# Altium PCB DIOBoard2.PcbDoc
Units mil, origin at the board's own origin, x right, y up, seen from the top; angles counter-clockwise.
Board outline 3937.01 x 5905.51 mil, 2 copper layers (Top Layer, Bottom Layer); 10 components, 98 nets, 59 pads, 7 vias.
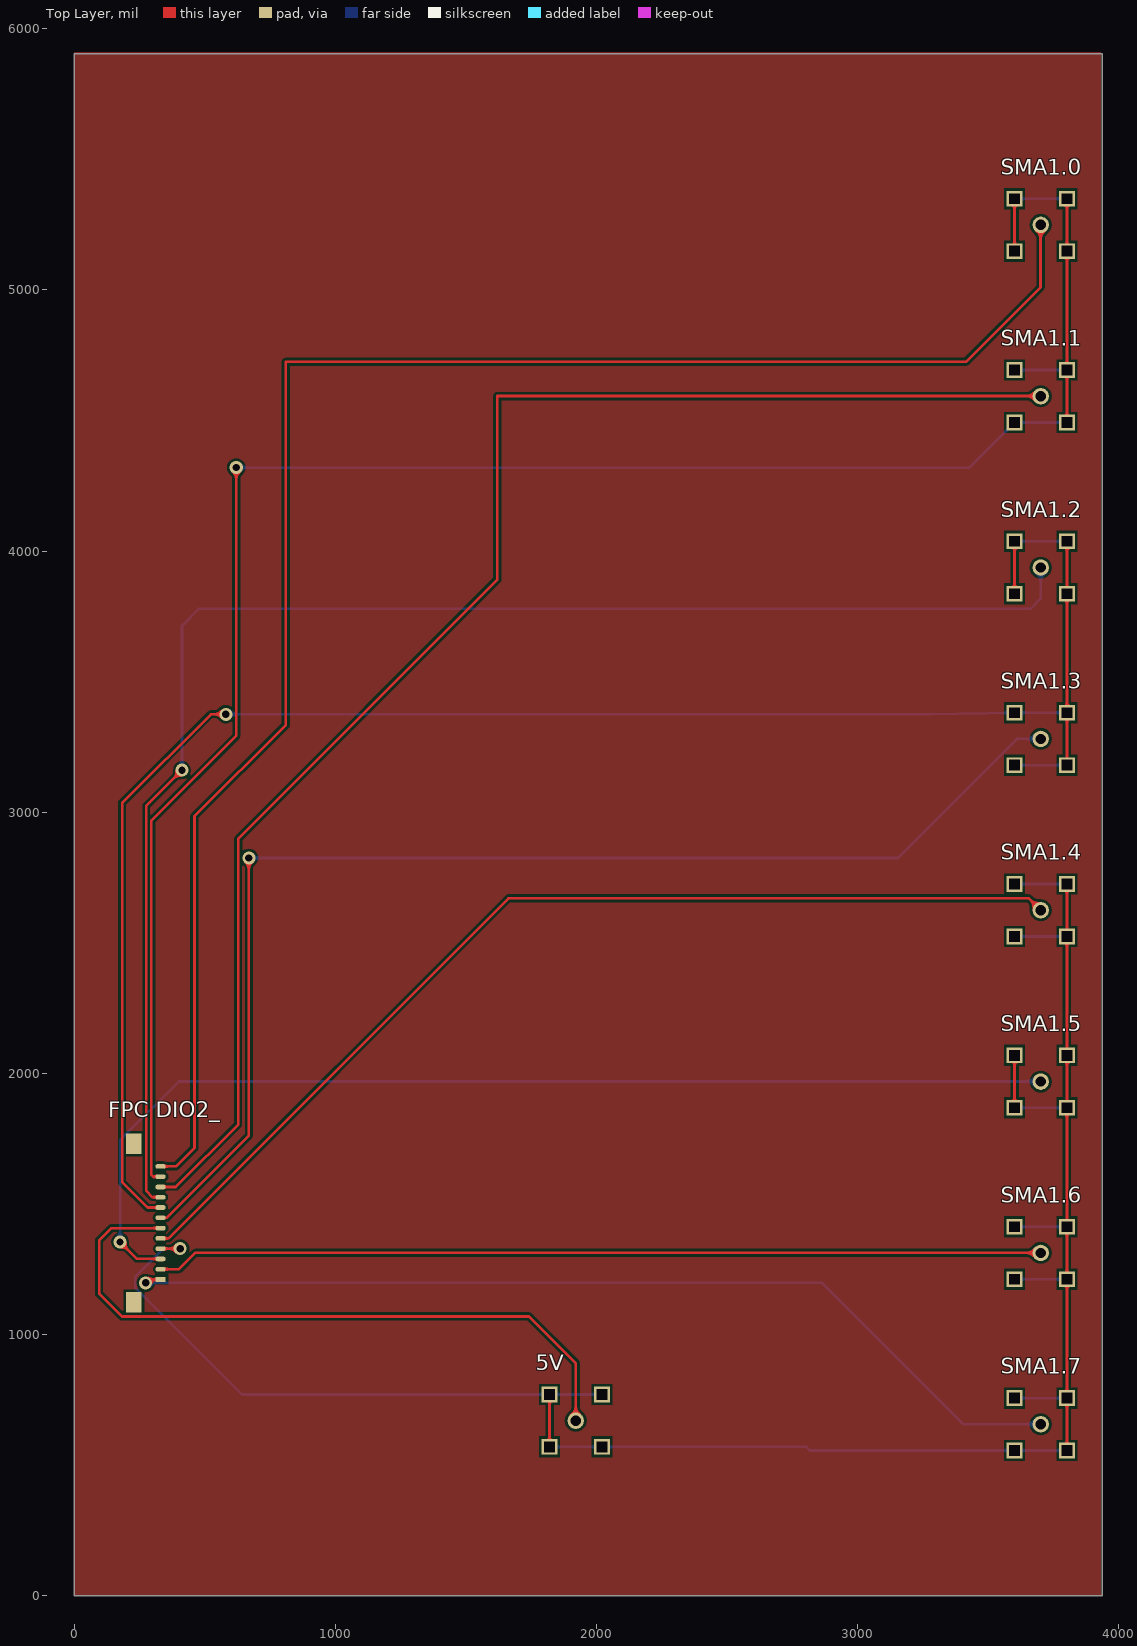
[diagram p0: Top Layer view]
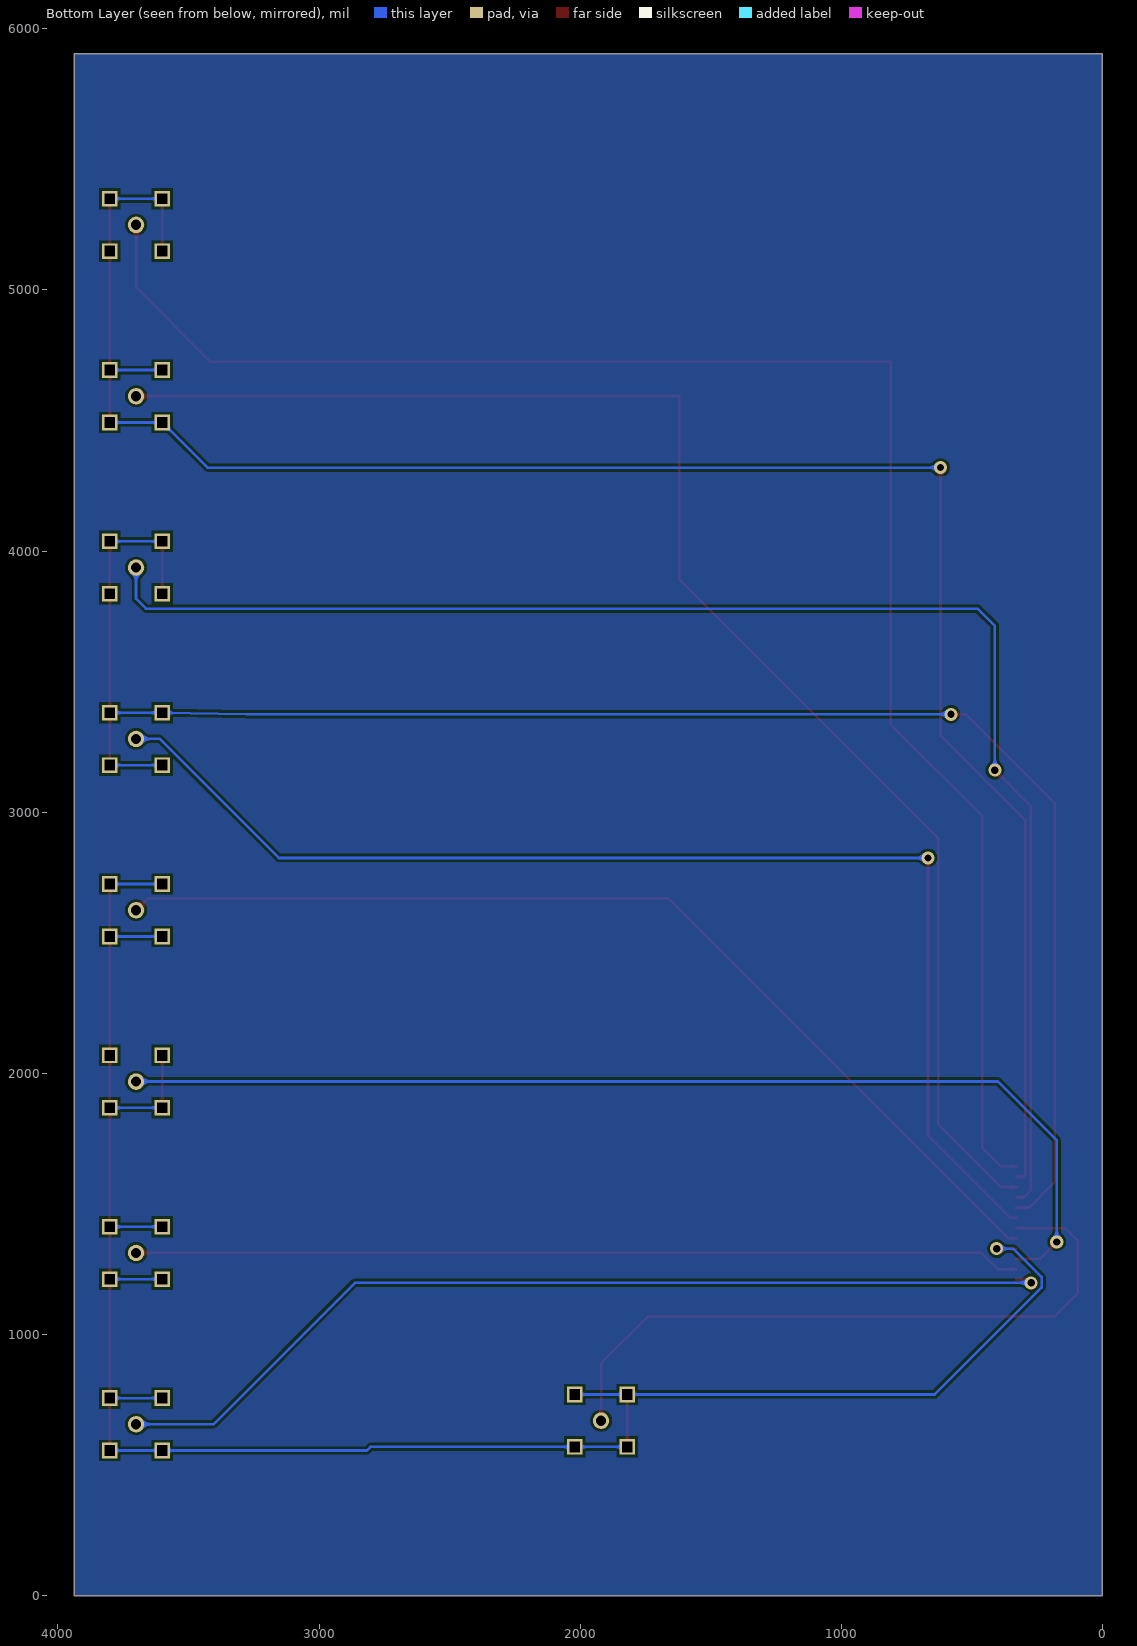
[diagram p1: Bottom Layer view, seen from below]

## Layer stack, top to bottom
Top Solder: solder mask 0.4, Solder Resist, Dk 3.5
Top Layer: signal copper 1.4
Dielectric 1: dielectric 12.6, FR-4, Dk 4.8
Bottom Layer: signal copper 1.4
Bottom Solder: solder mask 0.4, Solder Resist, Dk 3.5

## Board outline
0,0 3937.01,0 3937.01,5905.51 0,5905.51

## Design rules (kind name [scope] priority, off if disabled: settings)
Clearance [All] p1: gap=10 ignorepadtopadclearanceinfootprint=FALSE except(0: Arc-Hole Track-Hole SMDPad-Hole THPad-Hole Via-Hole Fill-Hole Poly-Hole Region-Hole Text-Hole)
PolygonConnect [All] p1: connectstyle=Relief reliefconductorwidth=10 reliefentries=4 polygonreliefangle="90 Angle" airgapwidth=10
RoutingVias [All] p1: holewidth=28 width=50 viastyle="Through Hole" minholewidth=28 minwidth=50 maxholewidth=28 maxwidth=50
SolderMaskExpansion [All] p1: expansion=4
Width [All] p1: maxlimit=10 minlimit=10 preferedwidth=10
30 further rules are at their usual default settings.

## Classes and differential pairs
component class DOIBoard2: 5V "FPC DIO2_" SMA1.1 SMA1.2 SMA1.3 SMA1.4 SMA1.5 SMA1.6 SMA1.7

## Components (designator, comment, footprint, x,y, rotation, side; value= is the part's Value field where it differs from the comment)
5V "SMA" SMA 1920,670 r0 top
"FPC DIO2_" "FPC socket 12 pin" "FPC 12pin" 330,1210.63 r180 top
SMA1.0 "SMA" SMA 3700.79,5249.33 r0 top
SMA1.1 "SMA" SMA 3700.79,4593.16 r0 top
SMA1.2 "SMA" SMA 3700.79,3937 r0 top
SMA1.3 "SMA" SMA 3700.79,3280.83 r0 top
SMA1.4 "SMA" SMA 3700.79,2624.67 r0 top
SMA1.5 "SMA" SMA 3700.79,1968.5 r0 top
SMA1.6 "SMA" SMA 3700.79,1312.34 r0 top
SMA1.7 "SMA" SMA 3700.79,656.17 r0 top

## Footprints (in the part's own frame and the unit in brackets; to place one, negate y for a bottom-side part, rotate by r counter-clockwise, add the part's x,y. Pads: shape width x height; smd on the part's side, far side on the other; paste and mask are expansions set on the pad)
"FPC 12pin" [mm]
  rect 1x0.45 smd: 1(0,0)
  oval 1x0.45 smd: 2(0,-1) 3(0,-2) 4(0,-3) 5(0,-4) 6(0,-5) 7(0,-6) 8(0,-7) 9(0,-8) 10(0,-9) 11(0,-10) 12(0,-11)
  rect 1.5x2 smd: 13(2.6,-13.2) 14(2.6,2.2)
SMA [mm]
  round 1.6 hole 1: 1(0,0)
  rect 1.524x1.524 hole 1 square: 2(-2.55,-2.55) 2(-2.55,2.55) 2(2.55,-2.55) 2(2.55,2.55)

## Via types
v1: diameter 50, hole 28, Top Layer to Bottom Layer, 7 vias

## Nets (pads, with @x,y where several pads share a name; then routed paths per layer and width w, separated by ;. In a path a pad name is that pad's centre, name@x,y a point inside that pad or via, vN(x,y) a via of type N, cw(c..) or ccw(c..) an arc to the next point about the centre after c; other vN are vias at no path point)
Net5V_1: 5V.1 "FPC DIO2_.6" | length 2613.3
  Top Layer w10: 330,1407.48 142.48,1407.48 95,1360 95,1157 183,1069 1741,1069 1920,890 5V.1
Net5V_2: 5V.2 "FPC DIO2_.4" SMA1.4.2 SMA1.5.2 SMA1.6.2 SMA1.7.2 | length 8052
  Top Layer w10: 330,1328.74 v1(405,1328.74) ; 5V.2@1819.61,569.61 5V.2@1819.61,770.39 ; SMA1.5.2@3600.39,1868.11 SMA1.5.2@3600.39,2068.89 ; SMA1.7.2@3801.18,555.78 3801.18,756.56 3801.18,1211.94 3801.18,1412.73 3801.18,1868.11 3801.18,2068.89 3801.18,2524.27 SMA1.4.2@3801.18,2725.06
  Bottom Layer w10: v1(405,1328.74) 341.74,1328.74 233,1220 233,1180 642.61,770.39 1819.61,770.39 5V.2@2020.39,770.39 ; 5V.2@1819.61,569.61 2020.39,569.61 2803,569.61 2816.83,555.78 3600.39,555.78 SMA1.7.2@3801.18,555.78 ; SMA1.7.2@3600.39,756.56 SMA1.7.2@3801.18,756.56 ; SMA1.6.2@3600.39,1211.94 SMA1.6.2@3801.18,1211.94 ; SMA1.6.2@3600.39,1412.73 SMA1.6.2@3801.18,1412.73 ; SMA1.5.2@3600.39,1868.11 SMA1.5.2@3801.18,1868.11 ; SMA1.4.2@3600.39,2524.27 SMA1.4.2@3801.18,2524.27 ; SMA1.4.2@3600.39,2725.06 SMA1.4.2@3801.18,2725.06
NetC1_1: 
NetC1_2: 
NetC3_1: 
NetC3_2: 
NetC5_1: 
NetC5_2: 
NetC7_1: 
NetC7_2: 
"NetFPC AI1_1": 
"NetFPC AI1_2": 
"NetFPC AI1_3": 
"NetFPC AI1_4": 
"NetFPC AI1_5": 
"NetFPC AI1_6": 
"NetFPC AI1_7": 
"NetFPC AI1_8": 
"NetFPC AI1_9": 
"NetFPC AI1_10": 
"NetFPC AI1_11": 
"NetFPC AI1_12": 
"NetFPC AI2_1": 
"NetFPC AI2_2": 
"NetFPC AI2_3": 
"NetFPC AI2_4": 
"NetFPC AI2_5": 
"NetFPC AI2_6": 
"NetFPC AI2_7": 
"NetFPC AI2_8": 
"NetFPC AI2_9": 
"NetFPC AI2_10": 
"NetFPC AI2_11": 
"NetFPC AI2_12": 
"NetFPC AO_1": 
"NetFPC AO_2": 
"NetFPC AO_3": 
"NetFPC AO_4": 
"NetFPC DIO1_1": 
"NetFPC DIO1_2": 
"NetFPC DIO1_3": 
"NetFPC DIO1_4": 
"NetFPC DIO1_5": 
"NetFPC DIO1_6": 
"NetFPC DIO1_7": 
"NetFPC DIO1_8": 
"NetFPC DIO1_9": 
"NetFPC DIO1_10": 
"NetFPC DIO1_11": 
"NetFPC DIO1_12": 
"NetFPC DIO2_1": 
"NetFPC DIO2_2": 
"NetFPC DIO2_3": 
"NetFPC DIO2_4": 
"NetFPC DIO2_5": 
"NetFPC DIO2_6": 
"NetFPC DIO2_7": 
"NetFPC DIO2_8": 
"NetFPC DIO2_9": 
"NetFPC DIO2_10": 
"NetFPC DIO2_11": 
"NetFPC DIO2_12": 
"NetFPC DIO2__1": "FPC DIO2_.1" SMA1.7.1 | length 3714.5
  Top Layer w10: v1(273,1198) 285.63,1210.63 330,1210.63
  Bottom Layer w10: v1(273,1198) 2863,1198 3404.83,656.17 SMA1.7.1
"NetFPC DIO2__2": "FPC DIO2_.2" SMA1.6.1 | length 3396.6
  Top Layer w10: 330,1250 400,1250 462.33,1312.34 SMA1.6.1
"NetFPC DIO2__3": "FPC DIO2_.3" SMA1.5.1 | length 4190.7
  Top Layer w10: v1(175,1354.37) 240,1289.37 330,1289.37
  Bottom Layer w10: v1(175,1354.37) 175,1744 400,1969 3700.29,1969 SMA1.5.1
"NetFPC DIO2__5": "FPC DIO2_.5" SMA1.4.1 | length 3928.8
  Top Layer w10: 330,1368.11 360,1368.11 1661.89,2670 3655.46,2670 SMA1.4.1
"NetFPC DIO2__7": "FPC DIO2_.7" SMA1.3.1 | length 4753.1
  Top Layer w10: 330,1446.85 352.85,1446.85 668,1762 v1(668,2825)
  Bottom Layer w10: v1(668,2825) 3154,2825 3609.83,3280.83 SMA1.3.1
"NetFPC DIO2__8": "FPC DIO2_.8" SMA1.2.2 SMA1.3.2 | length 6857.6
  Top Layer w10: 330,1486.22 280,1486.22 183,1583.22 183,3035.46 522.54,3375 v1(580,3375) ; SMA1.2.2@3600.39,3836.61 SMA1.2.2@3600.39,4037.39 ; SMA1.3.2@3801.18,3180.44 3801.18,3381.23 3801.18,3836.61 SMA1.2.2@3801.18,4037.39
  Bottom Layer w10: v1(580,3375) 3278,3375 3600.39,3381.23 SMA1.3.2@3801.18,3381.23 ; SMA1.3.2@3600.39,3180.44 SMA1.3.2@3801.18,3180.44 ; SMA1.2.2@3600.39,4037.39 SMA1.2.2@3801.18,4037.39
"NetFPC DIO2__9": "FPC DIO2_.9" SMA1.2.1 | length 5736.5
  Top Layer w10: 330,1525.59 300,1525.59 275,1550.59 275,3024 v1(412,3161)
  Bottom Layer w10: v1(412,3161) 412,3714 478,3780 3663,3780 3700.79,3817.79 SMA1.2.1
"NetFPC DIO2__10": "FPC DIO2_.10" SMA1.1.1 | length 5678.5
  Top Layer w10: 330,1564.96 387.96,1564.96 628,1805 628,2899 1620,3891 1620,4594 3699.95,4594 SMA1.1.1
"NetFPC DIO2__11": "FPC DIO2_.11" SMA1.0.2 SMA1.1.2 | length 7593.2
  Top Layer w10: 330,1604.33 302,1604.33 295,1611.33 295,2968 620,3293 v1(620,4320) ; SMA1.0.2@3600.39,5148.94 SMA1.0.2@3600.39,5349.72 ; SMA1.1.2@3801.18,4492.77 3801.18,4693.56 3801.18,5148.94 SMA1.0.2@3801.18,5349.72
  Bottom Layer w10: v1(620,4320) 3427.62,4320 3600.39,4492.77 SMA1.1.2@3801.18,4492.77 ; SMA1.1.2@3600.39,4693.56 SMA1.1.2@3801.18,4693.56 ; SMA1.0.2@3600.39,5349.72 SMA1.0.2@3801.18,5349.72
"NetFPC DIO2__12": "FPC DIO2_.12" SMA1.0.1 | length 6562.2
  Top Layer w10: 330,1643.7 388.7,1643.7 460,1715 460,2985 810,3335 810,4725 3415,4725 3700,5010 3700,5248.54 SMA1.0.1
"NetFPC DIO3_1": 
"NetFPC DIO3_2": 
"NetFPC DIO3_3": 
"NetFPC DIO3_4": 
"NetFPC DIO3_5": 
"NetFPC DIO3_6": 
"NetFPC DIO3_7": 
"NetFPC DIO3_8": 
"NetFPC DIO3_9": 
"NetFPC DIO3_10": 
"NetFPC DIO3_11": 
"NetFPC DIO3_12": 
"NetFPC DIO 1__1": 
"NetFPC DIO 1__2": 
"NetFPC DIO 1__3": 
"NetFPC DIO 1__4": 
"NetFPC DIO 1__5": 
"NetFPC DIO 1__6": 
"NetFPC DIO 1__7": 
"NetFPC DIO 1__8": 
"NetFPC DIO 1__9": 
"NetFPC DIO 1__10": 
"NetFPC DIO 1__11": 
"NetFPC DIO 1__12": 
"NetFPC Other_1": 
"NetFPC Other_2": 
pads on no net: "FPC DIO2_.13" "FPC DIO2_.14"

## Polygon pours and split planes (outlines as drawn)
no net on Top Layer "Top Layer-No Net" (solid, pour order 0): 0,5910 3930,5910 3930,10 3940,0 0,0
no net on Bottom Layer "Bottom Layer-No Net" (solid, pour order 2): 0,5905.51 3937.01,5905.51 3937.01,0 0,0

## Silkscreen, mask and mechanical layers (free items; w line width, h text height)
Drill Drawing:
  lines w10: 0,0 0,5905.51 3937.01,5905.51 3937.01,0 1968.5,0 0,0
  text "DIO Board 2 V1.0 Ying" at 2630,70 h60